# EAGLE board SteeringWheel (EAGLE 8.3.2)
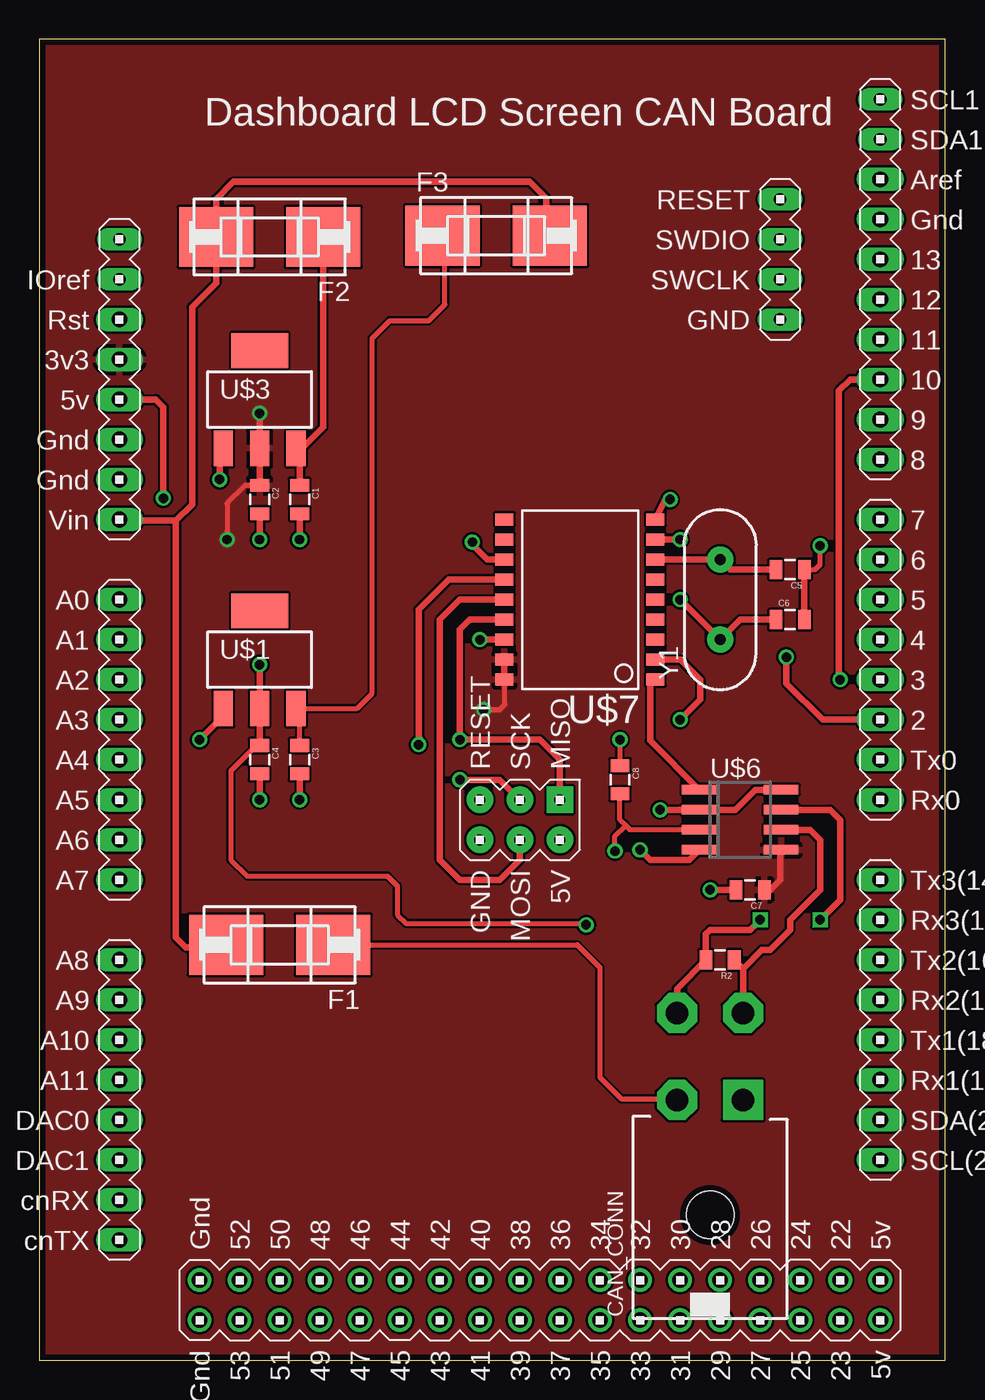
[diagram p0: board, top side]
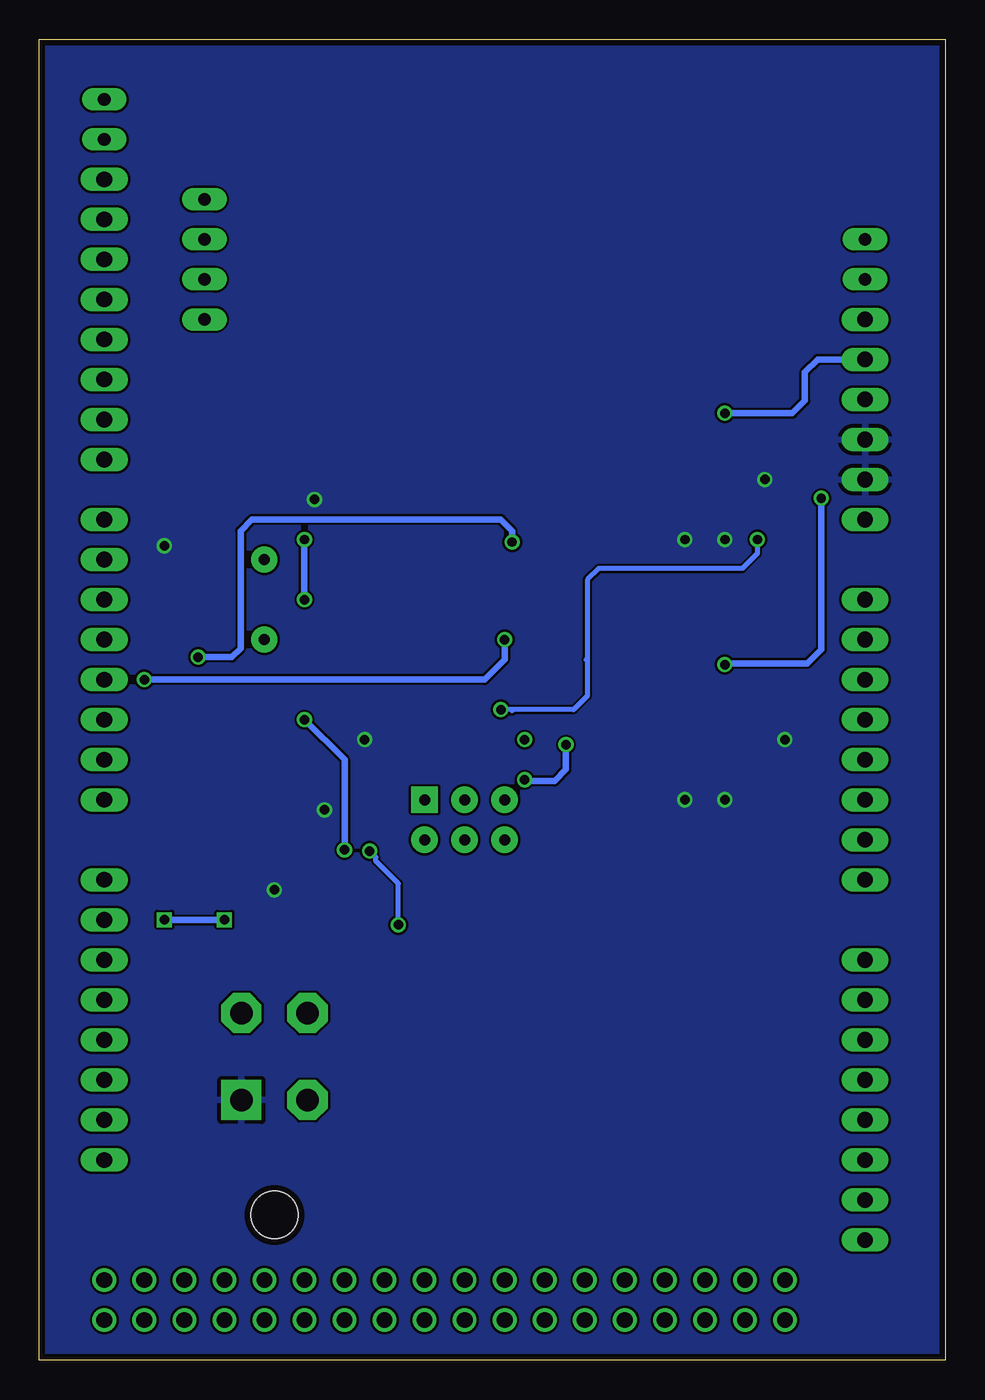
[diagram p1: board, bottom side, seen from below]

Size 57.45 x 83.81 mm. Coordinates in mm from the lower left corner, seen from the top.
Outline: 0,0 57.45,0 57.45,83.81 0,83.81 0,0
Copper layers (1*16): Top 0.0356mm / dielectric 1.5011mm / Bottom 0.0356mm
Design rules "LaenPCBOrder": minimum track width 6mil, minimum drill 13mil, track to track 6mil, track to pad 6mil, pad to pad 6mil, via to via 6mil, smd to smd 6mil, copper to edge 15mil, drill to drill 6mil, minimum pad ring 7mil, minimum via ring 7mil, stop-mask expansion 3mil, vias tented up to drill 0mil, thermal gap 10mil

## Footprints (pad centres in the part's own frame; a part is rotated, then mirrored left to right if it is on the bottom)
0805 = smd 0.8 x 1.2: 1 -0.9,0; 2 0.9,0
39-30-?04? = drill 1.422 pad 2.54 square: 1 2.095,0 | drill 1.422 pad 2.54 octagon: 2 -2.095,0; 3 2.095,5.512; 4 -2.095,5.512 | hole 3: 0,-7.3
OMNIBLOK = smd 4.7 x 3.8: P$1 -3.4,0; P$2 3.4,0
SOT223 = smd 1.219 x 2.235: 1 -2.311,-3.099; 2 0,-3.099; 3 2.311,-3.099 | smd 3.6 x 2.2: 4 0,3.099
DUE(NORMAL) = drill 1 long: 2 -16.51,30.48; 3 -19.05,30.48; 3V3 -39.37,-17.78; 4 -21.59,30.48; 5 -24.13,30.48; 5V -36.83,-17.78; 6 -26.67,30.48; 7 -29.21,30.48; 8 -33.02,30.48; 9 -35.56,30.48; 10 -38.1,30.48; 11 -40.64,30.48; 12 -43.18,30.48; 13 -45.72,30.48; A0 -24.13,-17.78; A1 -21.59,-17.78; A2 -19.05,-17.78; A3 -16.51,-17.78; A4 -13.97,-17.78; A5 -11.43,-17.78; A6 -8.89,-17.78; A7 -6.35,-17.78; A8 -1.27,-17.78; A9 1.27,-17.78; A10 3.81,-17.78; A11 6.35,-17.78; AREF -50.8,30.48; CANRX 13.97,-17.78; CANTX 16.51,-17.78; DAC0 8.89,-17.78; DAC1 11.43,-17.78; GND1 -48.26,30.48; GND_1 -34.29,-17.78; GND_2 -31.75,-17.78; RESET -41.91,-17.78; RX0 -11.43,30.48; RX1 6.35,30.48; RX2 1.27,30.48; RX3 -3.81,30.48; SCL 11.43,30.48; SDA 8.89,30.48; TX0 -13.97,30.48; TX1 3.81,30.48; TX2 -1.27,30.48; TX3 -6.35,30.48; VIN -29.21,-17.78 | drill 1: 5V_A 19.05,30.48; 5V_B 21.59,30.48; 22 19.05,27.94; 23 21.59,27.94; 24 19.05,25.4; 25 21.59,25.4; 26 19.05,22.86; 27 21.59,22.86; 28 19.05,20.32; 29 21.59,20.32; 30 19.05,17.78; 31 21.59,17.78; 32 19.05,15.24; 33 21.59,15.24; 34 19.05,12.7; 35 21.59,12.7; 36 19.05,10.16; 37 21.59,10.16; 38 19.05,7.62; 39 21.59,7.62; 40 19.05,5.08; 41 21.59,5.08; 42 19.05,2.54; 43 21.59,2.54; 44 19.05,0; 45 21.59,0; 46 19.05,-2.54; 47 21.59,-2.54; 48 19.05,-5.08; 49 21.59,-5.08; 50 19.05,-7.62; 51 21.59,-7.62; 52 19.05,-10.16; 53 21.59,-10.16; GND_A 19.05,-12.7; GND_B 21.59,-12.7 | drill 0.7 pad 1.676: 5V_ICSP -8.89,5.08; GND_ICSP -8.89,10.16; MOSI_ICSP -8.89,7.62; RESET_ICSP -11.43,5.08; SCK_ICSP -11.43,7.62 | drill 0.8 pad 1.422 long: GND_DEBUG -41.91,24.13; IOREF -44.45,-17.78; NC -46.99,-17.78; RESET_DEBUG -49.53,24.13; SCL1 -55.88,30.48; SDA1 -53.34,30.48; SWCLK_DEBUG -44.45,24.13; SWDIO_DEBUG -46.99,24.13 | drill 0.7 pad 1.676 square: MISO_ICSP -11.43,10.16
SOIC8 = smd 0.6 x 2.2: 1 -1.905,-2.6; 2 -0.635,-2.6; 3 0.635,-2.6; 4 1.905,-2.6; 5 1.905,2.6; 6 0.635,2.6; 7 -0.635,2.6; 8 -1.905,2.6
SO-18W = smd 0.762 x 1.143: 1 -5.08,-4.788; 2 -3.81,-4.788; 3 -2.54,-4.788; 4 -1.27,-4.788; 5 0,-4.788; 6 1.27,-4.788; 7 2.54,-4.788; 8 3.81,-4.788; 9 5.08,-4.788; 10 5.08,4.788; 11 3.81,4.788; 12 2.54,4.788; 13 1.27,4.788; 14 0,4.788; 15 -1.27,4.788; 16 -2.54,4.788; 17 -3.81,4.788; 18 -5.08,4.788
HC49US = drill 0.7 pad 1.651: 1 -2.54,0; 2 2.54,0

## Placement (x,y rotation side)
C1  .1µF  [0805]  16.51,54.61 270 top
C2  .1µF  [0805]  13.97,54.61 270 top
C3  .1µF  [0805]  16.51,38.1 270 top
C4  .1µF  [0805]  13.97,38.1 270 top
C5  [0805]  47.62,50.16 180 top
C6  [0805]  47.62,46.99 0 top
C7  .1µF  [0805]  45.09,29.84 180 top
C8  .1µF  [0805]  36.83,36.83 270 top
CAN_CONN  39-30-04?  [39-30-?04?]  42.55,16.51 0 top
F1  SMD-MICRO-FUSE-BLOCK  [OMNIBLOK]  15.24,26.35 180 top
F2  SMD-MICRO-FUSE-BLOCK  [OMNIBLOK]  14.6,71.28 180 top
F3  SMD-MICRO-FUSE-BLOCK  [OMNIBLOK]  28.97,71.36 0 top
R2  120Ω  [0805]  43.18,25.4 180 top
U$1  NCP1117ST50T3G  [SOT223]  13.97,44.45 0 top
U$2  DUE(NORMAL)  [DUE(NORMAL)]  22.86,24.13 270 top
U$3  NCP1117ST33T3G  [SOT223]  13.97,60.96 0 top
U$6  MCP2562  [SOIC8]  44.45,34.29 270 top
U$7  MCP2515  [SO-18W]  34.29,48.26 90 top
Y1  [HC49US]  43.18,48.26 90 top

## Library data of the parts
C1-C8 = SparkFun-Capacitors
CAN_CONN = con-molex-mini-fit
F1-F3 = f-lf-omniblok-s
R2 = SparkFun-Resistors
U$1 U$3 U$6 U$7 = NUSOLAR_Custom
U$2 = DUElib130425
Y1 = SparkFun-FreqCtrl

## Nets
3.3V: C2.1 C7.1 U$2.3V3 U$3.2 U$6.5 U$7.17 U$7.18
5V: C4.1 C8.2 U$1.2 U$2.5V U$6.3
12V: F1.P$2 F2.P$2 F3.P$2 U$2.VIN
CAN+: CAN_CONN.2 F1.P$1
CAN_CS: U$2.10 U$7.16
CAN_H: CAN_CONN.4 R2.2 U$6.7
CAN_INT: U$2.2 U$7.12
CAN_L: CAN_CONN.3 R2.1 U$6.6
CAN_RX: U$6.4 U$7.2
CAN_TX: U$6.1 U$7.1
CRUISE_OFF: U$2.A0
CRUISE_ON: U$2.4
FORWARD: U$2.6
GND: C1.2 C2.2 C3.2 C4.2 C5.1 C6.2 C7.2 C8.1 CAN_CONN.1 U$1.1 U$2.GND_1 U$2.GND_2 U$3.1 U$6.2 U$6.8 U$7.9
HEAD: U$2.9
HORN: U$2.5
IGNITION: U$2.8
LAP_TIMER: U$2.A1
LEFT: U$2.3
MISO: U$2.MISO_ICSP U$7.15
MOSI: U$2.MOSI_ICSP U$7.14
N$1: C3.1 F3.P$1 U$1.3
N$2: C1.1 F2.P$1 U$3.3
N$7: C5.2 U$7.7 Y1.2
N$11: C6.1 U$7.8 Y1.1
REVERSE: U$2.7
RIGHT: U$2.A2
SCK: U$2.SCK_ICSP U$7.13

## Tracks (layer width: path | path; a pad name or v marks a point on that pad's centre or on a via)
3.3V  (via drill 0.6)
  Top 0.305: C2.1 13.04,55.51 11.91,54.37 11.91,52.63 v11.91,52.07 | v28.18,41.27 29.21,41.27 29.53,41.59 29.53,43.16 U$7.18
  Top 0.406: C2.1 U$3.2 v13.97,60.09 | U$7.18 U$7.17 | U$6.5 46.99,32.33 46.99,30.48 46.36,29.84 C7.1
  Bottom 0.305: v11.91,52.07 11.91,51.2 12.86,50.24 21.99,50.24 22.7,49.53 22.7,44.53 | 22.7,44.53 22.78,44.45 | 22.7,44.53 22.7,42.15 23.57,41.27 27.38,41.27 | 27.38,41.27 27.46,41.2 | 27.38,41.27 v28.18,41.27
  Bottom 0.406: U$2.3V3 8.1,63.5 8.89,62.71 8.89,60.88 9.68,60.09 v13.97,60.09
  pour Top: 0,83.82 57.15,83.82 57.15,82.55 57.15,0 0,0
5V  (via drill 0.6)
  Top 0.305: C4.1 13.76,39 12.14,37.39 12.14,31.75 13.18,30.72 22.07,30.72 22.7,30.08 22.7,28.26 23.26,27.7 34.45,27.7 34.61,27.54 v34.69,27.62 | U$6.3 37.47,33.66 37.19,33.93 | 37.19,33.93 36.83,34.29 C8.2 | v36.51,32.31 36.51,33.26 37.19,33.93
  Top 0.406: C4.1 U$1.2 v13.97,44.13 | U$2.5V 7.38,60.96 7.86,60.48 v7.86,54.69
  Bottom 0.305: v34.69,27.62 34.69,30.24 36.12,31.67 36.12,31.91 v36.51,32.31
  Bottom 0.406: 13.89,44.05 v13.97,44.13 13.89,44.21 8.73,44.21 7.86,45.09 v7.86,54.69
12V
  Top 0.406: F3.P$2 32.15,71.58 32.15,73.74 31.12,74.77 12.3,74.77 11.21,73.67 F2.P$2 11.21,68.36 9.68,66.83 9.68,54.29 8.65,53.26 | 5.16,53.26 U$2.VIN 5.16,53.26 | 8.65,53.26 5.16,53.26 | 8.65,53.26 8.65,26.83 9.29,26.19 11.68,26.19 F1.P$2
CAN+
  Top 0.305: F1.P$1 34.13,26.35 35.56,24.92 35.56,17.94 36.91,16.59 40.37,16.59 CAN_CONN.2
CAN_CS  (via drill 0.6)
  Top 0.406: U$7.16 v27.94,45.72 | U$2.10 51.44,62.23 50.72,61.52 50.72,43.26 v50.8,43.18
  Bottom 0.406: v27.94,45.72 27.94,44.45 29.21,43.18 v50.8,43.18
CAN_H  (via drill 0.6)
  Top 0.406: U$6.7 50.17,34.92 50.8,34.29 50.8,29.21 v49.53,27.94 | v45.72,27.94 45.09,27.3 42.55,27.3 42.28,27.04 R2.2 40.45,23.57 CAN_CONN.4
  Bottom 0.406: v49.53,27.94 v45.72,27.94
CAN_INT  (via drill 0.6)
  Top 0.406: U$7.12 28.42,50.8 27.46,51.75 v27.46,51.91 | v47.39,44.61 47.39,42.94 49.69,40.64 U$2.2
  Bottom 0.406: v27.46,51.91 27.46,52.63 28.18,53.34 43.97,53.34 44.69,52.63 44.69,45.16 45.24,44.61 47.23,44.61 47.39,44.45 v47.39,44.61
CAN_L
  Top 0.406: U$6.6 48.9,33.66 49.53,33.02 49.53,29.84 47.62,27.94 47.62,27.3 46.36,26.04 45.84,26.04 44.64,24.84 | CAN_CONN.3 44.64,24.84 | 44.64,24.84 R2.1
CAN_RX  (via drill 0.6)
  Top 0.406: U$7.2 40.64,44.45 41.91,43.18 41.91,41.91 v40.64,40.64 | v38.1,32.38 38.73,31.75 41.22,31.75 U$6.4
  Bottom 0.406: v40.64,40.64 38.1,38.1 v38.1,32.38
CAN_TX
  Top 0.406: U$7.1 38.73,43.18 38.73,39.31 U$6.1
GND  (via drill 0.6)
  Top 0.305: v36.83,39.37 C8.1 | C5.1 49.21,50.16 49.53,50.48 v49.53,51.67
  Top 0.406: U$3.1 11.43,57.63 v11.43,55.88 | C4.2 v13.97,35.56 | C3.2 v16.51,35.56 | v39.37,34.92 U$6.2 44.13,34.92 45.4,36.2 U$6.8 | C6.2 C5.1 | C7.2 v42.55,29.84 | U$7.9 39.71,54.61 v40.01,54.61 | U$1.1 11.66,40.87 v10.16,39.37 | C2.2 v13.97,52.07 | C1.2 v16.51,52.07
  pour Bottom: 0,83.82 57.15,83.82 57.15,64.77 57.15,0 0,0
MISO  (via drill 0.6)
  Top 0.406: U$7.15 27.3,46.99 26.67,46.35 v26.67,39.37 31.75,39.37 33.02,38.1 U$2.MISO_ICSP
MOSI
  Top 0.406: U$2.MOSI_ICSP 30.48,31.75 29.21,30.48 26.67,30.48 25.4,31.75 25.4,46.99 26.67,48.26 U$7.14
N$1
  Top 0.305: C3.1 16.51,41.12 U$1.3 20.16,41.35 21.11,42.31 21.11,64.85 22.23,65.96 24.69,65.96 25.72,66.99 25.72,70.8 25.16,71.36
  Top 0.406: F3.P$1 25.16,71.36 24.84,71.36 24.69,71.52
N$2
  Top 0.406: U$3.3 16.51,57.86 16.51,57.71 | 16.51,57.71 C1.1 | F2.P$1 18.01,59.2 16.51,57.71
N$7
  Top 0.406: U$7.7 Y1.2 43.81,50.16 C5.2
N$11  (via drill 0.6)
  Top 0.406: v40.64,48.26 Y1.1 44.45,46.99 C6.1 | v40.64,52.07 U$7.8
  Bottom 0.406: v40.64,48.26 v40.64,52.07
SCK  (via drill 0.6)
  Top 0.406: U$2.SCK_ICSP 29.21,36.83 v26.67,36.83 | U$7.13 25.96,49.53 24.05,47.62 24.05,39.53 24.13,39.45 24.13,39.13 v24.05,39.05
  Bottom 0.406: v24.05,39.05 24.05,37.47 24.77,36.75 26.59,36.75 v26.67,36.83

## Text on the board
tPlace: Dashboard LCD Screen CAN Board